# EAGLE board hello_board_square_student2015 (EAGLE 7.5.0)
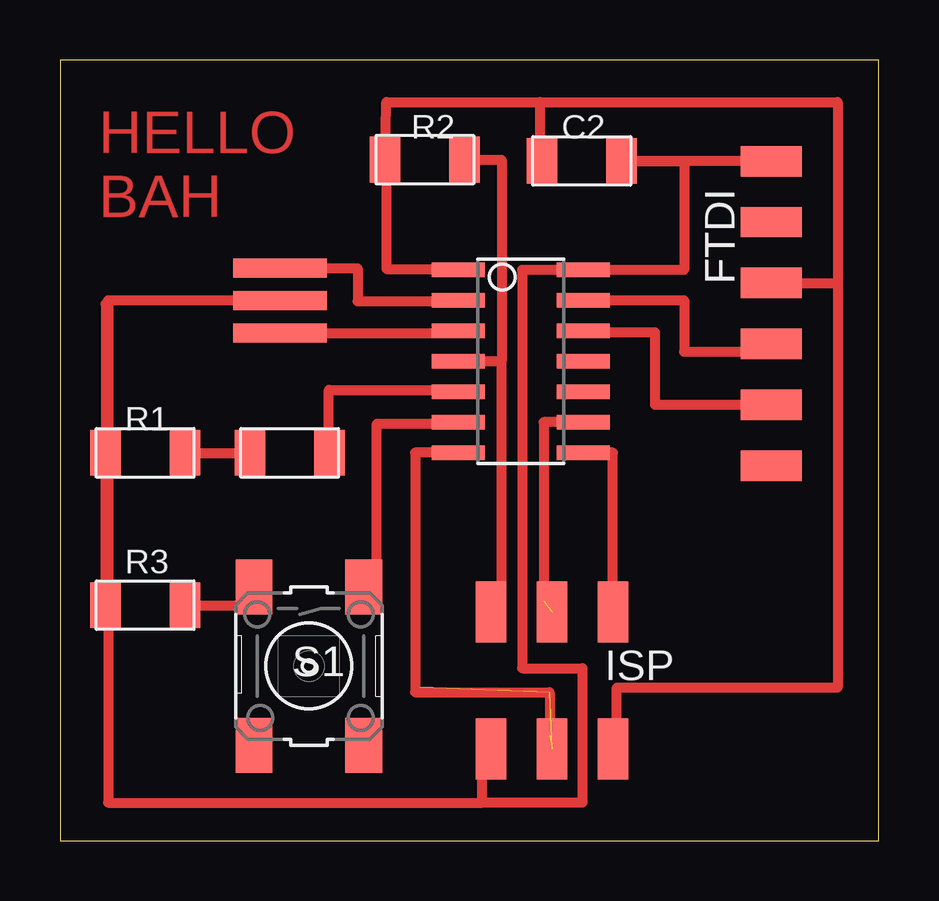
[diagram p0: board, top side]

Size 34.12 x 32.56 mm. Coordinates in mm from the lower left corner, seen from the top.
Outline: 0,0 34.12,0 34.12,32.56 0,32.56 0,0
Copper layers (1*16): Top 0.035mm / dielectric 1.5mm / Bottom 0.035mm
Design rules "default": minimum track width 10mil, minimum drill 24mil, track to track 8mil, track to pad 8mil, pad to pad 8mil, via to via 8mil, smd to smd 8mil, copper to edge 40mil, drill to drill 8mil, minimum pad ring 10mil, minimum via ring 8mil, stop-mask expansion 4mil, vias tented up to drill 0mil, thermal gap 10mil

## Footprints (pad centres in the part's own frame; a part is rotated, then mirrored left to right if it is on the bottom)
C1206FAB = smd 1.27 x 1.905: 1 -1.651,0; 2 1.651,0
1X06SMD = smd 2.54 x 1.27: 1 0,6.35; 2 0,3.81; 3 0,1.27; 4 0,-1.27; 5 0,-3.81; 6 0,-6.35
SOIC14 = smd 0.61 x 2.21: 1 -3.81,-2.603; 2 -2.54,-2.603; 3 -1.27,-2.603; 4 0,-2.603; 5 1.27,-2.603; 6 2.54,-2.603; 7 3.81,-2.603; 8 3.81,2.603; 9 2.54,2.603; 10 1.27,2.603; 11 0,2.603; 12 -1.27,2.603; 13 -2.54,2.603; 14 -3.81,2.603
2X03SMD = smd 2.54 x 1.27: 1 -2.857,2.54; 2 2.857,2.54; 3 -2.857,0; 4 2.857,0; 5 -2.857,-2.54; 6 2.857,-2.54
R1206FAB = smd 1.27 x 1.905: 1 -1.651,0; 2 1.651,0
6MM_SWITCH = smd 2.286 x 1.524: 1 -3.302,2.286; 2 3.302,2.286; 3 -3.302,-2.286; 4 3.302,-2.286
LED1206FAB = smd 1.27 x 1.905: 1 -1.651,0; 2 1.651,0
EFOBM = smd 0.8 x 3.9: 1 -1.35,0; 2 0,0; 3 1.35,0

## Placement (x,y rotation side)
C2  1uF  [C1206FAB]  21.74,28.35 180 top
FTDI  FTDI-SMD-HEADER  [1X06SMD]  29.63,21.99 0 top
IC1T44  ATTINY44-SSU  [SOIC14]  19.2,20 270 top
ISP  AVRISPSMD  [2X03SMD]  20.5,6.69 270 top
R1  10K  [R1206FAB]  3.55,16.18 180 top
R2  10K  [R1206FAB]  15.2,28.4 0 top
R3  270ohm  [R1206FAB]  3.55,9.83 180 top
S1  [6MM_SWITCH]  10.37,7.29 270 top
U$1  LEDFAB1206  [LED1206FAB]  9.57,16.18 180 top
U$3  20 MHz  [EFOBM]  9.17,22.53 270 top

## Library data of the parts
C2 FTDI IC1T44 ISP R1-R3 S1 U$1 U$3 = fab

## Nets
GND: C2.1 FTDI.1 IC1T44.14 ISP.6 R1.2 R3.2 U$3.2
N$1: IC1T44.7 ISP.4
N$2: IC1T44.8 ISP.1
N$3: IC1T44.2 U$3.1
N$4: IC1T44.9 ISP.3
N$5: FTDI.5 IC1T44.12
N$6: FTDI.4 IC1T44.13
N$7: IC1T44.3 U$3.3
N$8: IC1T44.4 ISP.5 R2.2
N$9: R1.1 U$1.2
N$10: R3.1 S1.3
N$13: IC1T44.5 U$1.1
N$14: IC1T44.6 S1.1
VCC: C2.2 FTDI.3 IC1T44.1 ISP.2 R2.1

## Tracks (layer width: path | path; a pad name or v marks a point on that pad's centre or on a via)
GND
  Top 0.406: R3.2 R1.2 1.9,22.4 2,22.4 | 2,22.4 2,22.53 U$3.2 | FTDI.1 25.79,28.34 C2.1 26,28.35 26,23.8 21.9,23.8 IC1T44.14 19.25,23.81 19.25,7.2 21.77,7.2 21.77,1.6 17.6,1.6 | 17.6,1.6 17.6,3.2 17.86,3.2 ISP.6 | 2,22.4 2,1.6 17.6,1.6
N$1  (3 unrouted)
  Top 0.406: IC1T44.7 14.8,16.19 14.8,6.2 20.4,6.2 20.4,4.4
N$2
  Top 0.406: ISP.1 23.04,16.19 IC1T44.8
N$3
  Top 0.406: U$3.1 12.4,23.88 12.4,22.5 16.3,22.5 IC1T44.2
N$4  (1 unrouted)
  Top 0.406: IC1T44.9 20.15,17.46 20.15,10
N$5
  Top 0.406: FTDI.5 24.8,18.18 24.8,21.2 21.9,21.2 IC1T44.12
N$6
  Top 0.406: IC1T44.13 26,22.54 26,20.4 29.63,20.4 FTDI.4
N$7
  Top 0.406: U$3.3 16.7,21.18 IC1T44.3
N$8
  Top 0.406: R2.2 18.4,28.4 18.4,20 | IC1T44.4 18.4,20 | ISP.5 18.4,9.55 18.4,20
N$9
  Top 0.406: R1.1 U$1.2
N$10
  Top 0.406: R3.1 8.5,9.83 S1.3
N$13
  Top 0.406: U$1.1 11.2,16.18 11.2,18.8 16.7,18.8 IC1T44.5
N$14
  Top 0.406: S1.1 13.2,10.59 13.2,17.4 16.7,17.4 IC1T44.6
VCC
  Top 0.406: ISP.2 23.2,3.83 23.2,6.4 32.4,6.4 32.4,23.26 | C2.2 20,28.75 20,30.8 | 20,30.8 32.4,30.8 32.4,23.26 | 20,30.8 13.6,30.8 R2.1 13.6,28.4 13.6,23.85 16.7,23.85 IC1T44.1 | FTDI.3 32.4,23.26

## Text on the board
Top: HELLO / BAH